# EAGLE board 2021-02-22_22-45-23 (EAGLE 6.4)
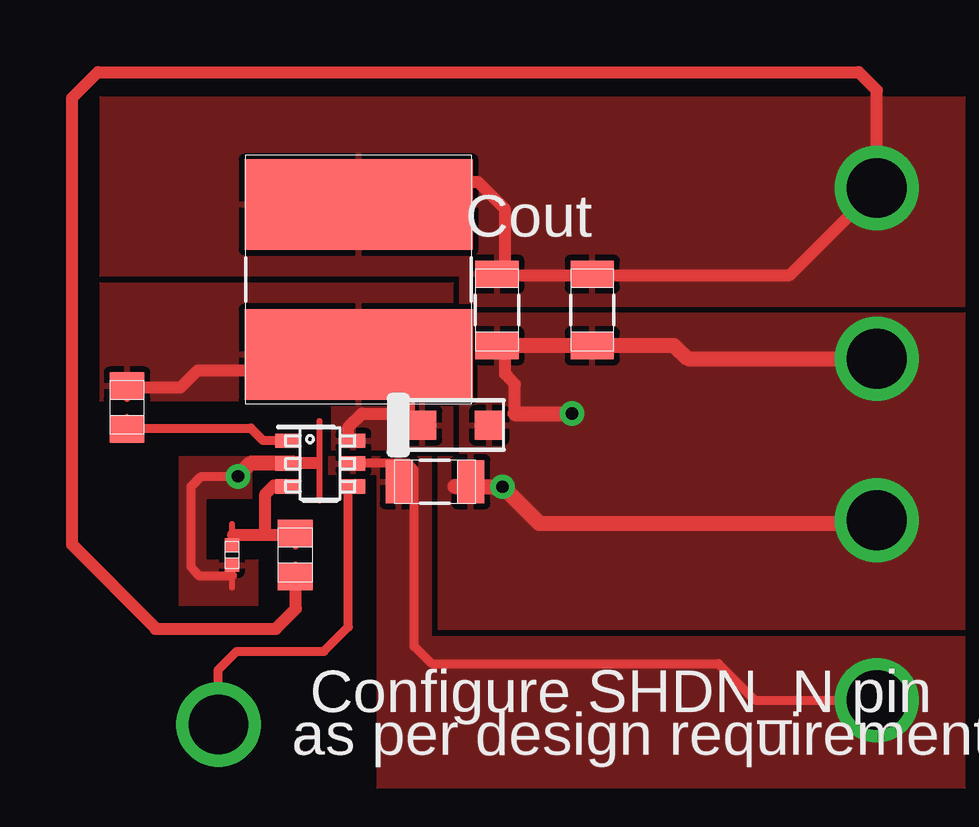
[diagram p0: board, top side]
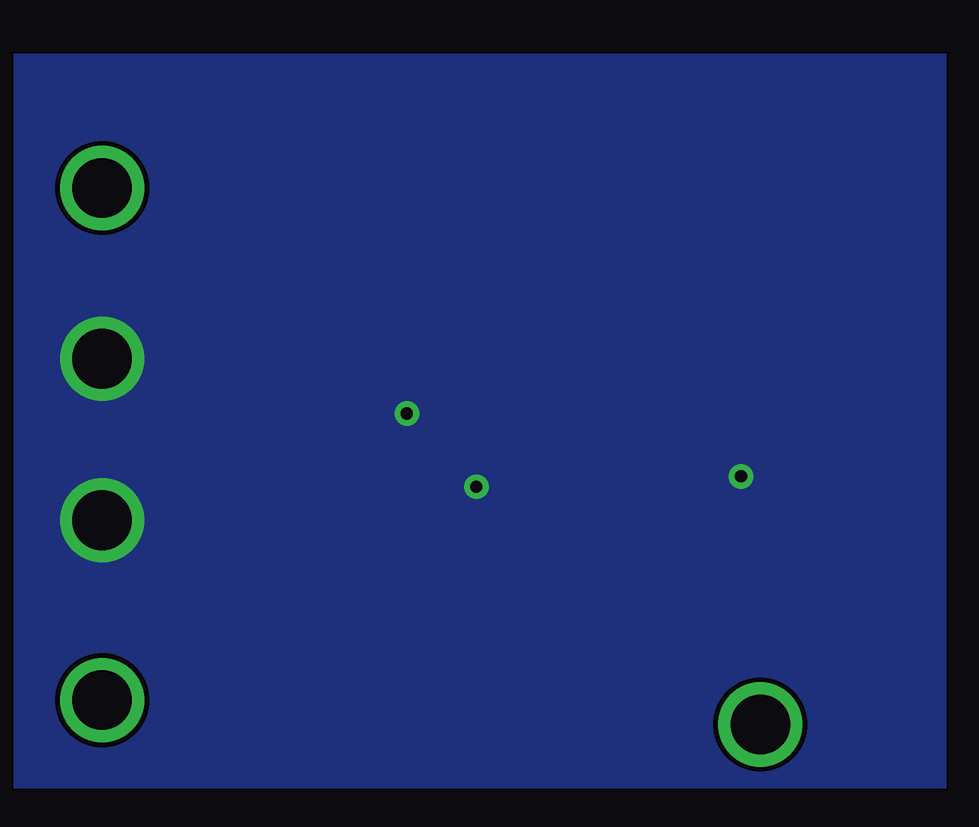
[diagram p1: board, bottom side, seen from below]

No outline drawn. Coordinates in mm, seen from the top.
Copper layers ((1*2)+(15*16)): TOP / INTERNAL1 / layer 15 / BOTTOM

## Footprints (pad centres in the part's own frame; a part is rotated, then mirrored left to right if it is on the bottom)
0805 = smd 1.118 x 1.448: 1 -0.902,0; 2 0.902,0
1206 = smd 1.118 x 1.803: 1 -1.499,0; 2 1.499,0
1206_180 = smd 1.118 x 1.803: 1 -1.499,0; 2 1.499,0
SOD-123F = smd 1.2 x 1.2: 1 -1.4,0; 2 1.4,0
TP-1502 = drill 0.813 round: 1 0,0
IND_NPI105C = smd 3.759 x 9.5: 1 -3.124,0; 2 3.124,0
0402 = smd 0.559 x 0.61: 1 -0.419,0; 2 0.419,0
DDC0006A_N = smd 1 x 0.6: 1 -1.375,0.95; 2 -1.375,0; 3 -1.375,-0.95; 4 1.375,-0.95; 5 1.375,0; 6 1.375,0.95

## Placement (x,y rotation side)
Cboot  [0805]  29.72,41.66 90 top
Cin  [1206]  42.55,38.56 0 top
Cout_1  [1206_180]  45.14,45.72 270 top
Cout_2  [1206_180]  49.1,45.72 270 top
D1  [SOD-123F]  43.41,40.92 0 top
GND  [TP-1502]  60.96,43.69 270 top
GND1  [TP-1502]  60.96,36.96 270 top
L1  [IND_NPI105C]  39.37,46.99 90 top
Rfbb  [0402]  34.09,35.51 270 top
Rfbt  [0805]  36.73,35.51 90 top
SHDN_N  [TP-1502]  33.53,28.45 270 top
U1  [DDC0006A_N]  37.77,39.32 0 top
VIN  [TP-1502]  60.96,29.44 270 top
VOUT  [TP-1502]  60.96,50.8 270 top

## Library data of the parts
Cboot = ultra-librarian; RefDes: Cboot; Type: C0805C104M5RACTU
Cin = ultra-librarian; RefDes: Cin; Type: GRM31CR71H475KA12L
Cout_1 Cout_2 = ultra-librarian
D1 = ultra-librarian; RefDes: D1; Type: SS24FL
GND = ultra-librarian; RefDes: GND; Type: TP-1502
GND1 = ultra-librarian; RefDes: GND1; Type: TP-1502
L1 = ultra-librarian; RefDes: L1; Type: NPI105C220MTRF
Rfbb = ultra-librarian; RefDes: Rfbb; Type: CRCW040220K0FKED
Rfbt = ultra-librarian; RefDes: Rfbt; Type: RT0805BRD07111KL
SHDN_N = ultra-librarian; RefDes: SHDN_N; Type: TP-1502
U1 = ultra-librarian; RefDes: U1; Type: LMR14010ADDCR
VIN = ultra-librarian; RefDes: VIN; Type: TP-1502
VOUT = ultra-librarian; RefDes: VOUT; Type: TP-1502

## Nets
0: Cin.2 Cout_1.2 Cout_2.2 D1.2 GND1.1 GND.1 Rfbb.2 U1.2
1: Cboot.1 U1.1
2: Rfbb.1 Rfbt.2 U1.3
5: Cout_1.1 Cout_2.1 L1.2 Rfbt.1 VOUT.1
6: Cboot.2 D1.1 L1.1 U1.6
12: Cin.1 U1.5 VIN.1
14: SHDN_N.1 U1.4

## Tracks (layer width: path | path; a pad name or v marks a point on that pad's centre or on a via)
0  (via drill 0.51 pad 1.02, 2.49 pad 3.48)
  TOP 0.254: 37.74,37.77 37.74,39.32 | 37.74,39.34 37.74,41.1 | GND.1 60.96,44.45 | 34.1,34.16 34.1,35.1
  TOP 0.381: 34.11,34.65 32.72,34.65 32.38,35 32.38,38.35 32.82,38.79 v34.34,38.79
  TOP 0.508: 37.01,39.34 37.54,39.34 | 45.87,41.4 45.87,42.62 45.47,43.05 45.47,44.25
  TOP 0.635: 36.6,39.34 34.9,39.34 v34.34,38.79 | GND1.1 60.83,36.83 46.89,36.83 v45.36,38.35 43.38,38.35 | GND.1 53.09,43.69 52.5,44.25 45.47,44.25 | 45.87,41.4 v48.26,41.4
  other vias: 60.96,43.69 60.96,36.96
  pour TOP (rank 5): 43.56,39.62 42.67,39.62 42.67,32.38 64.64,32.38 64.64,45.59 43.56,45.59
  pour TOP (rank 6): 35.18,35.31 33.02,35.31 33.02,37.85 34.92,37.85 34.92,39.62 31.88,39.62 31.88,33.4 35.18,33.4
  pour BOTTOM (rank 4): 25.78,25.78 64.64,25.78 64.64,56.39 25.78,56.39
1
  TOP 0.254: 29.7,40.31 29.7,41.25
  TOP 0.381: 29.72,40.79 34.87,40.79 35.38,40.28 36.6,40.28
2
  TOP 0.254: 36.74,35.87 36.74,36.8 | 34.1,35.87 34.1,36.8
  TOP 0.508: 35.48,36.35 35.48,38.05 35.84,38.41 36.6,38.41 | 34.14,36.35 35.48,36.35 | 35.48,36.35 36.75,36.35
5  (via drill 2.49 pad 3.48)
  TOP 0.254: 60.98,50.85 61.09,50.95 | 36.74,34.16 36.74,35.1
  TOP 0.508: 35.18,51.05 44.32,51.05 45.47,49.91 45.47,47.17 57.33,47.17 VOUT.1 60.96,54.86 60.2,55.63 28.5,55.63 27.43,54.56 27.43,35.94 30.91,32.44 35.92,32.44 36.75,33.27 36.75,34.65
  other vias: 60.96,50.8
  pour TOP (rank 2): 43.56,45.85 43.56,47.12 28.57,47.12 28.57,54.61 64.64,54.61 64.64,45.85
6
  TOP 0.254: 29.7,42.01 29.7,42.95
  TOP 0.508: 29.72,42.49 31.95,42.49 32.66,43.2 35.18,43.2 41.05,43.2 41.48,42.8 41.48,41.4 39.5,41.4 38.94,40.84 38.94,40.28
  pour TOP (rank 3): 43.31,39.88 38.23,39.88 38.23,41.91 28.57,41.91 28.57,46.86 43.31,46.86
12  (via drill 2.49 pad 3.48)
  TOP 0.381: 38.91,39.34 41.43,39.34 41.68,39.06 41.68,38.35 41.68,31.7 42.42,30.99 54.36,30.99 55.88,29.46 v60.96,29.46
  pour TOP: 38.1,38.86 40.13,38.86 40.13,25.78 64.64,25.78 64.64,32.13 42.42,32.13 42.42,39.62 38.1,39.62
14  (via drill 2.49 pad 3.48)
  TOP 0.381: 38.94,38.41 38.94,32.51 37.92,31.5 34.29,31.5 33.53,30.73 SHDN_N.1
  other vias: 33.53,28.45

## Text on the board
ASSYNOTES: Cout | Configure SHDN_N pin | as per design requirement.